# Altium PCB dsau-motherboard-revA.PcbDoc (part 2 of 4)
Units mil, origin at the board's own origin, x right, y up, seen from the top; angles counter-clockwise.
Board outline 9475 x 6400 mil, 4 copper layers (Component Side, Ground Plane, Power Plane, Solder Side), stack 65.2 mil thick; 212 components, 202 nets, 998 pads, 1047 vias.
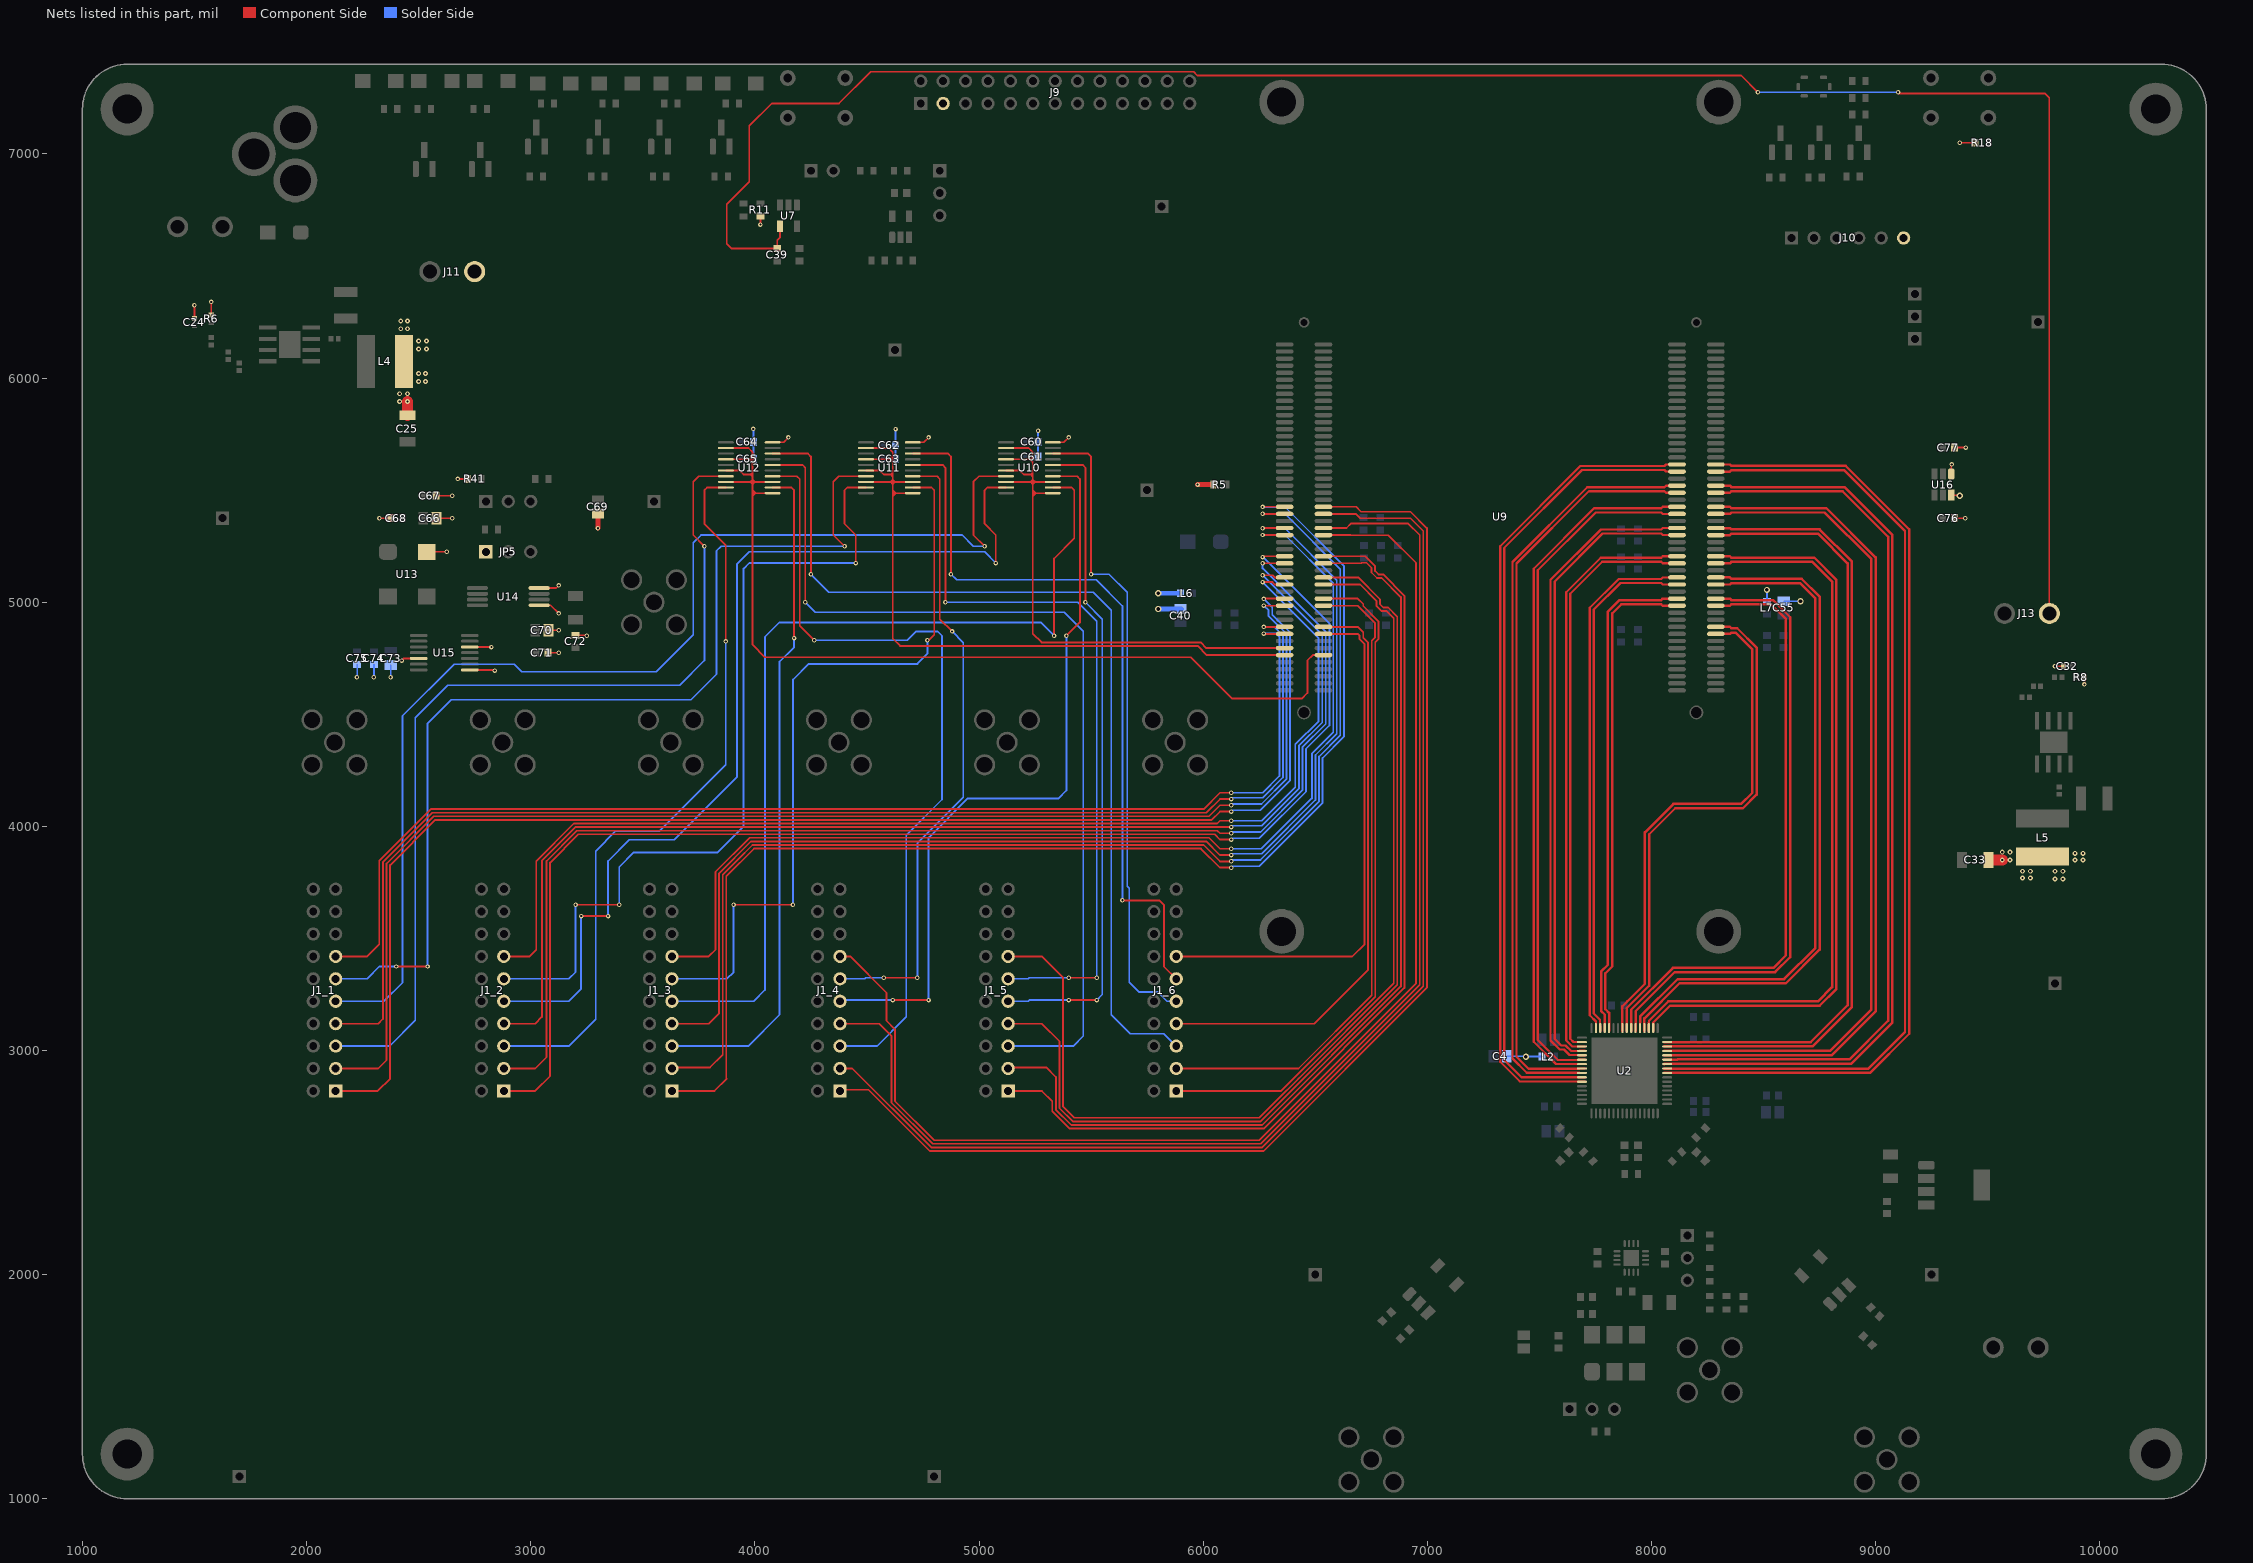
[diagram p4: the nets of this part, all layers, seen from the top]

## Via types
v1: diameter 20, hole 10, Component Side to Solder Side, 768 vias
v2: diameter 28, hole 16, Component Side to Solder Side, 117 vias
v3: diameter 22, hole 10, Component Side to Solder Side, 104 vias
v4: diameter 50, hole 28, Component Side to Solder Side, 46 vias
v5: diameter 28, hole 16, Component Side to Solder Side, tented top, 6 vias
v6: diameter 25.98, hole 12.99, Component Side to Solder Side, tented top, 5 vias
v7: diameter 25.98, hole 10, Component Side to Solder Side, tented top, 1 vias

## Nets (pads, with @x,y where several pads share a name; then routed paths per layer and width w, separated by ;. In a path a pad name is that pad's centre, name@x,y a point inside that pad or via, vN(x,y) a via of type N, cw(c..) or ccw(c..) an arc to the next point about the centre after c; other vN are vias at no path point) (continued)
CLKOUT_N: U2.56 U9.81 | length 2347.6
  Component Side w11: U2.56@7889.84,3087.17 7889.84,3189.84 7990,3290 7990,3965 8106,4081 8407.87,4081 8469,4142.13 8469,4797.78 8382.87,4883.91 8356,4883.91 8350,4889.91 8350,4890.16 U9.81@8287.11,4890.16
CLKOUT_P: U2.57 U9.83 | length 2324
  Component Side w11: U2.57@7870.16,3087.17 7870.16,3125 7870.5,3125.34 ; 7870.84,3132.87 7870.84,3125.69 7870.5,3125.34 ; U9.83@8287.11,4858.66 8350,4858.66 8356.25,4864.91 8375,4864.91 8450,4789.91 8450,4150 8400,4100 8098.13,4100 7971,3972.87 7971,3297.87 7892.13,3219 7892.07,3219 7870.5,3197.43 7870.5,3125.34
D1V8: C4.1 C32.1 C33.1 C39.2 C76.2 J13.1 L2.1 L5.1 R8.1 U7.4 U16.6 | length 9525.5
  Component Side w8: U7.4@4112.6,6677.76 4112.6,6627.6 4100,6615 C39.2@4100,6577.56 3897.44,6577.56 3875,6600 3875,6775 3975,6875 3975,7125 4075,7225 4375,7225 4516.53,7366.53 5957.2,7366.53 5973.73,7350 8400,7350 v1(8475,7275) ; v1(9100,7275) 9106,7269 9756,7269 9775,7250 J13.1@9775,4950 ; U16.6@9337.4,5477.76 9372.24,5477.76 v2(9375,5475) ; C76.2@9352.56,5375 v1(9400,5375) ; v3@9559.65,3850.35 v3@9560,3850 ; v1(9800,4714.65) C32.1@9838.5,4714.65 ; v1(9931.5,4633.5) R8.1@9931.5,4665.35
  Component Side w50: C33.1@9510,3850.35 9564.65,3850.35 v3(9565,3850)
  Solder Side w8: C4.1@7354.53,2975 7437.88,2975 v2(7440,2972.88) L2.1@7512.47,2972.88 ; v1(8475,7275) v1(9100,7275)
  other v3: 9800,3765 9835,3765 9655,3770 9690,3770 9655,3800 9690,3800 9800,3800 9835,3800 9600,3850 9890,3850 9925,3850 9890,3880 9925,3880 9565,3885 9600,3885
D3V3: C24.1 C25.1 C40.1 C55.1 C60.2 C61.1 C62.2 C63.1 C64.2 C65.1 C66.1 C67.1 C68.1 C69.1 C70.1 C71.1 C72.1 C73.1 C74.1 C75.1 C77.1 J9.3 J10.6 J11.1 JP5.1 L4.1 L6.1 L7.1 R5.2 R6.1 R11.2 R18.1 R41.1 U10.20 U11.20 U12.20 U13.4 U14.1 U14.4 U15.5 U15.8 U15.12 U16.1 | length 2794.7
  Component Side w8: C24.1@1500,6266.5 v1(1500,6325) ; R6.1@1575,6281.5 v1(1575,6340) ; v1(2325,5375) C68.1@2372.44,5375 ; v1(2425,4740) 2434.41,4749.41 U15.5@2500,4749.41 ; v3@2450,5889.65 v3@2450.35,5890 ; U13.4@2536.61,5225 v1(2625,5225) ; C67.1@2577.56,5475 v1(2650,5475) ; C66.1@2579.53,5375 v1(2650,5375) ; v1(2675,5550) R41.1@2720.47,5550 ; U15.12@2728.35,4800.59 2824.41,4800.59 v1(2825,4800) ; U15.8@2730.12,4700 U15.8@2728.35,4698.23 ; 2821.77,4698.23 U15.8@2728.35,4698.23 ; v1(2840,4695) 2836.77,4698.23 U15.8@2728.35,4698.23 ; U14.4@3037.8,5063.39 3113.39,5063.39 v1(3125,5075) ; C71.1@3077.56,4775 v1(3125,4775) ; C70.1@3079.53,4875 v1(3125,4875) ; C72.1@3200,4852.56 3247.44,4852.56 v1(3250,4850) ; v1(4025,6685) R11.2@4025,6720.47 ; U12.20@4079.33,5713.39 4128.39,5713.39 v1(4150,5735) ; U11.20@4704.33,5713.39 4753.39,5713.39 v1(4775,5735) ; U10.20@5329.33,5713.39 5378.39,5713.39 v1(5400,5735) ; U16.1@9337.4,5572.24 9337.4,5612.4 v1(9340,5615) ; C77.1@9352.56,5690 v1(9402.56,5690) ; v1(9375,7050) R18.1@9445.47,7050 ; 3088.39,4986.61 U14.1@3037.8,4986.61 3088.39,4986.61 ; 3088.39,4986.61 v1(3125,4950) 3088.39,4986.61
  Component Side w22: v1(3300,5330) C69.1@3300,5395.47 ; v1(5975,5525) R5.2@6045.47,5525
  Component Side w50: C25.1@2450,5834 2450,5894.65 v3(2450.35,5895)
  Solder Side w8: v1(2225.02,4665) 2225.85,4665.83 C75.1@2225.85,4722.44 ; v1(2300.02,4665) 2300.85,4665.83 C74.1@2300.85,4722.44 ; v1(2375.02,4665) 2375.85,4665.83 C73.1@2375.85,4720.47 ; C65.1@3993.35,5640 C64.2@3993.35,5715 v1(3993.35,5773.35) v1@3995,5775 ; v1@4625,5775 v1(4627.56,5772.44) C62.2@4627.56,5699.98 C63.1@4627.56,5639.98 ; C61.1@5263.35,5650 C60.2@5263.35,5715 v1(5263.35,5765) ; L7.1@8515.02,5002.56 v2(8515,5055) ; C55.1@8590.02,5004.53 8664.53,5004.53 v2(8665,5005)
  Solder Side w22: v2@5800,4969.53 C40.1@5904.21,4969.53 ; v2(5800,5040) 5798.23,5040 L6.1@5898.23,5040
  other v2: 5800,4970
  other v3: 2415.35,5895 2415.35,5930 2450.35,5930 2500.35,5985 2530.35,5985 2500.35,6020 2530.35,6020 2500.35,6130 2535.35,6130 2500.35,6165 2535.35,6165 2420.35,6220 2450.35,6220 2420.35,6255 2450.35,6255
DA0_N: U2.40 U9.35 | length 4398.1
  Component Side w11: U2.40@8057.17,2900.16 8080,2900.16 8080.34,2900.5 8975.5,2900.5 9150,3075 9150,5325 8866.68,5608.32 8356.25,5608.32 8350,5614.57 U9.35@8287.11,5614.57
DA0_P: U2.41 U9.37 | length 4335.1
  Component Side w11: U2.41@8057.17,2919.84 8080,2919.84 8080.34,2919.5 8967.63,2919.5 9131,3082.87 9131,5317.13 8858.81,5589.32 8356.25,5589.32 8350,5583.07 U9.37@8287.11,5583.07
DA2_N: U2.42 U9.41 | length 4148.7
  Component Side w11: U2.42@8057.17,2939.53 8057.85,2940.21 8123.63,2940.21 8125,2941.58 8891.58,2941.58 9075,3125 9075,5300 8861.17,5513.83 8356.25,5513.83 8350,5520.08 U9.41@8287.11,5520.08
DA2_P: U2.43 U9.43 | length 4085.5
  Component Side w11: U2.43@8057.17,2959.21 8115.76,2959.21 8117.13,2960.58 8883.71,2960.58 9056,3132.87 9056,5292.13 8853.3,5494.83 8356.25,5494.83 8350,5488.58 U9.43@8287.11,5488.58
DA4_N: U2.44 U9.47 | length 3855.4
  Component Side w11: U2.44@8057.17,2978.9 8100,2978.9 8100.69,2979.58 8804.58,2979.58 9000,3175 9000,5200 8780.66,5419.34 8356.25,5419.34 8350,5425.59 U9.47@8287.11,5425.59
DA4_P: U2.45 U9.49 | length 3792.1
  Component Side w11: U2.45@8057.17,2998.58 8796.71,2998.58 8981,3182.87 8981,5192.13 8772.79,5400.34 8356.25,5400.34 8350,5394.09 U9.49@8287.11,5394.09
DA6_N: U2.46 U9.53 | length 3565.7
  Component Side w11: U2.46@8057.17,3018.27 8100,3018.27 8100.34,3018.61 8718.61,3018.61 8894,3194 8894,5181 8750.15,5324.85 8356.25,5324.85 8350,5331.1 U9.53@8287.11,5331.1
DA6_P: U2.47 U9.55 | length 3502.7
  Component Side w11: U2.47@8057.17,3037.95 8100,3037.95 8100.34,3037.61 8710.74,3037.61 8875,3201.87 8875,5173.13 8742.28,5305.85 8356.25,5305.85 8350,5299.61 U9.55@8287.11,5299.61
DA8_N: U2.50 U9.61 | length 3323.4
  Component Side w11: U2.50@8007.95,3087.17 8007.95,3125 8082.95,3200 8750,3200 8825,3275 8825,5100 8726.13,5198.87 8356.25,5198.87 8350,5205.12 U9.61@8287.11,5205.12
DA8_P: U2.51 U9.63 | length 3292.2
  Component Side w11: U2.51@7988.27,3087.17 7988.27,3125 7988.95,3125.68 7988.95,3132.87 8075.08,3219 8742.13,3219 8806,3282.87 8806,5092.13 8718.26,5179.87 8356.25,5179.87 8350,5173.62 U9.63@8287.11,5173.62
DA10_N: U2.52 U9.67 | length 3038.1
  Component Side w11: U2.52@7968.58,3087.17 7968.58,3143.58 8125,3300 8600,3300 8750,3450 8750,5025 8670.62,5104.38 8356.25,5104.38 8350,5110.63 U9.67@8287.11,5110.63
DA10_P: U2.53 U9.69 | length 3006.9
  Component Side w11: U2.53@7948.9,3087.17 7948.9,3125 7949.58,3125.68 7949.58,3151.45 8117.13,3319 8592.13,3319 8731,3457.87 8731,5017.13 8662.75,5085.38 8356.25,5085.38 8350,5079.13 U9.69@8287.11,5079.13
DA12_N: U2.54 U9.73 | length 2778.3
  Component Side w11: U2.54@7929.21,3087.17 7928.87,3087.51 7928.87,3175.13 8103.74,3350 8551.87,3350 8619,3417.13 8619,3835 8619,4932.87 8575.93,4975.94 ; U9.73@8287.11,5016.14 8350,5016.14 8356.25,5009.89 8500,5009.89 8541.98,5009.89 8575.93,4975.94 ; 8563.43,4988.44 8575.93,4975.94
DA12_P: U2.55 U9.75 | length 2729.1
  Component Side w11: U2.55@7909.53,3087.17 7909.87,3087.51 7909.87,3183 8095.87,3369 8544,3369 8600,3425 8600,3631.07 8600,4925 8534.11,4990.89 8500,4990.89 8356.25,4990.89 8350,4984.64 U9.75@8287.11,4984.64
DB0_N: U2.60 U9.76 | length 2191.2
  Component Side w11: U2.60@7811.1,3087.17 7811.1,3110 7810.76,3110.34 7810.76,3167.87 7794,3184.63 7794,3344 7825,3375 7825,3450 7825,3456.07 7825,3743.93 7825,3943.93 7825,4143.94 7825,4243.94 7825,4343.94 7825,4950 7865.89,4990.89 8043.75,4990.89 8050,4984.64 U9.76@8113.89,4984.64
DB0_P: U2.61 U9.74 | length 2222.7
  Component Side w11: U2.61@7791.42,3087.17 7791.42,3110 7791.76,3110.34 7791.76,3160 7775,3176.76 7775,3351.87 7806,3382.87 7806,3536.07 7806,3736.07 7806,3836.07 7806,3936.07 7806,4136.06 7806,4236.06 7806,4336.06 7806,4957.87 7858.02,5009.89 8043.75,5009.89 8050,5016.14 U9.74@8113.89,5016.14
DB2_N: U2.62 U9.70 | length 2315
  Component Side w10: U2.62@7771.73,3087.17 7771.73,3110 7770.89,3110.84 7770.89,3137.46 7743,3165.35 7743,3482.67 7743,3605.33 7743,3701.33 7743,3866.67 7743,3962.67 7743,4085.33 7743,4175 7743,4967.54 7861.34,5085.88 8043.25,5085.88 8050,5079.13 U9.70@8113.89,5079.13
DB2_P: U2.63 U9.68 | length 2344.8
  Component Side w10: U2.63@7752.05,3087.17 7752.05,3110 7752.89,3110.84 7752.89,3130 7725,3157.89 7725,3490.13 7725,3597.87 7725,3693.87 7725,3874.13 7725,4077.87 7725,4175 7725,4975 7853.88,5103.88 8043.25,5103.88 8050,5110.63 8065,5110.63 U9.68@8113.89,5110.63
DB4_N: U2.2 U9.64 | length 2593.8
  Component Side w10: U2.2@7702.83,3037.95 U2.2@7689.84,3037.95 7680,3037.95 7652.5,3037.95 7638,3052.46 7638,5037.54 7780.82,5180.37 8043.25,5180.37 8050,5173.62 U9.64@8113.89,5173.62
DB4_P: U2.3 U9.62 | length 2654.1
  Component Side w10: U2.3@7702.83,3018.27 U2.3@7689.84,3018.27 7646.73,3018.27 7620,3045 7620,5045 7773.37,5198.37 8043.25,5198.37 8050,5205.12 U9.62@8113.89,5205.12
DB6_N: U2.4 U9.56 | length 2835.4
  Component Side w10: U2.4@7702.83,2998.58 7680,2998.58 7679.16,2997.74 7641.61,2997.74 7616.98,3022.37 7597.63,3022.37 7568,3052 7568,5092.54 7781.81,5306.35 8043.25,5306.35 8050,5299.61 U9.56@8113.89,5299.61
DB6_P: U2.5 U9.54 | length 2895.2
  Component Side w10: U2.5@7702.83,2978.9 7680,2978.9 7679.16,2979.74 7634.16,2979.74 7609.53,3004.37 7590.47,3004.37 7590.32,3004.22 7550,3044.54 7550,5100 7774.35,5324.35 8043.25,5324.35 8050,5331.1 U9.54@8113.89,5331.1
DB8_N: U2.6 U9.50 | length 3083.7
  Component Side w10: 7557.5,2982.5 7550,2990 ; U2.6@7702.83,2959.21 7675,2959.21 7674.16,2958.37 7581.63,2958.37 7550,2990 ; U9.50@8113.89,5394.09 8050,5394.09 8043.25,5400.84 7751.3,5400.84 7493,5142.54 7493,3047 7550,2990
DB8_P: U2.7 U9.48 | length 3132.8
  Component Side w10: U2.7@7702.83,2939.53 7675,2939.53 7674.16,2940.37 7574.17,2940.37 7475,3039.54 7475,5150 7743.84,5418.84 8043.25,5418.84 8050,5425.59 U9.48@8113.89,5425.59
DB10_N: U2.8 U9.44 | length 3380.1
  Component Side w10: U2.8@7702.83,2919.84 7680,2919.84 7679.16,2919 7451,2919 7398,2972 7398,5172.54 7720.79,5495.33 8058.25,5495.33 8065,5488.58 U9.44@8113.89,5488.58
DB10_P: U2.9 U9.42 | length 3439.7
  Component Side w10: U2.9@7702.83,2900.16 7680,2900.16 7679.16,2901 7443.54,2901 7380,2964.54 7380,5180 7713.33,5513.33 8058.25,5513.33 8065,5520.08 U9.42@8113.89,5520.08
DB12_N: U2.10 U9.38 | length 3594.3
  Component Side w10: U2.10@7702.83,2880.47 7419.98,2880.47 7343,2957.46 7343,5242.54 7690.27,5589.82 8058.25,5589.82 8065,5583.07 U9.38@8113.89,5583.07
DB12_P: U2.11 U9.36 | length 3654.7
  Component Side w10: U2.11@7702.83,2860.79 7680,2860.79 7678.31,2862.47 7412.53,2862.47 7325,2950 7325,5250 7682.82,5607.82 8058.25,5607.82 8065,5614.57 U9.36@8113.89,5614.57
DDS_CS1: J1_1.7 U9.182 | length 5919.6
  Component Side w8: J1_1.7@2130,3120 2320,3120 2340.63,3140.63 2340.63,3840.63 2561,4061 6014,4061 6075,4122 v1(6125,4122) ; v1(6270,4890) 6270.16,4890.16 U9.182@6363.39,4890.16
  Solder Side w8: v1(6125,4122) 6131,4128 6265.63,4128 6356,4218.37 6356,4851.63 6317.63,4890 v1(6270,4890)
DDS_CS2: J1_2.7 U9.168 | length 5597.7
  Component Side w8: J1_2.7@2880,3120 3020,3120 3050,3150 3050,3847.63 3199.37,3997 v1(6125,3997) ; v1(6265,5120) 6310.63,5120 6320,5110.63 U9.168@6363.39,5110.63
  Solder Side w8: v1(6125,3997) 6131,4003 6261.57,4003 6426.94,4168.37 6426.94,4359.31 6531,4463.37 6531,4855.11 6266.11,5120 v1(6265,5120)
DDS_CS3: J1_3.7 U9.154 | length 5246.7
  Component Side w8: J1_3.7@3630,3120 3795,3120 3840.63,3165.63 3840.63,3790.63 3983,3933 6014,3933 6075,3872 v1(6125,3872) ; v1(6265,5330) 6266.1,5331.1 U9.154@6363.39,5331.1
  Solder Side w8: v1(6125,3872) 6131,3878 6260.63,3878 6501,4118.37 6501,4318.37 6596,4413.37 6596,5099 6365,5330 v1(6265,5330)
DDS_CS4: J1_4.7 U9.153 | length 5805
  Component Side w8: J1_4.7@4380,3120 4555,3120 4609,3066 4609,2768.37 4793.37,2584 6256.63,2584 6966,3293.37 6966,5300 6915,5351 6659.23,5351 6639.33,5331.1 U9.153@6536.61,5331.1 6600,5331.1
DDS_CS5: J1_5.7 U9.167 | length 4400.3
  Component Side w8: J1_5.7@5130,3120 5280,3120 5359,3041 5359,2743.37 5418.37,2684 6257.14,2684 6866,3292.86 6866,4935.86 6825.42,4976.44 6804.25,4976.44 6789.02,4991.67 6789.02,5012.84 6691.23,5110.63 U9.167@6536.61,5110.63
DDS_CS6: J1_6.7 U9.181 | length 2657.4
  Component Side w8: J1_6.7@5880,3120 6495,3120 6736,3361 6736,4819.69 6714.02,4841.67 6714.02,4866.14 6690,4890.16 U9.181@6536.61,4890.16
DDS_IORESET: U9.190 U11.2 U11.4 U11.6 U11.8 U11.11 U11.13 | length 3505.3
  Component Side w8: U11.8@4495.67,5537.01 4605,5537.01 ; U11.6@4495.67,5587.4 4557.6,5587.4 4575,5570 4605,5570 ; U11.4@4495.67,5637.8 4600,5637.8 ; U11.2@4495.67,5688.19 4596.81,5688.19 4615,5670 4615,5652.8 ; 4615,5053.06 4615,5075 ; 4615,5525 4615,5527.01 ; 4615,5655 4615,5652.8 ; U11.11@4704.33,5486.61 4628.39,5486.61 ; U11.13@4704.33,5537.01 4625,5537.01 ; U9.190@6363.39,4764.17 6015.83,4764.17 5975,4805 4648.06,4805 4615,4838.06 4615,5075 ; 4600,5637.8 4602.2,5637.8 ; 4600,5637.8 4615,5652.8 ; 4602.2,5637.8 4615,5625 ; 4602.2,5637.8 4607.8,5637.8 ; 4605,5537.01 4615,5537.01 ; 4605,5537.01 4615,5527.01 ; 4605,5537.01 4615,5547.01 ; 4605,5570 4615,5570 ; 4605,5570 4615,5560 ; 4605,5570 4615,5580 ; 4607.8,5637.8 4610,5637.8 ; 4607.8,5637.8 4615,5645 ; 4610,5637.8 4612.2,5637.8 4615,5635 ; 4610,5637.8 4615,5632.8 ; 4615,5075 4615,5473.23 ; 4615,5473.23 4615,5475 ; 4615,5473.23 4628.39,5486.61 ; 4615,5475 4626.61,5486.61 ; 4615,5475 4615,5485 ; 4615,5485 4616.61,5486.61 4626.61,5486.61 ; 4615,5485 4615,5500 ; 4615,5500 4628.39,5486.61 ; 4615,5500 4615,5527.01 ; 4615,5527.01 4615,5537.01 ; 4615,5527.01 4625,5537.01 ; 4615,5537.01 4615,5547.01 ; 4615,5537.01 4625,5537.01 ; 4615,5547.01 4625,5537.01 ; 4615,5547.01 4615,5560 ; 4615,5560 4615,5570 ; 4615,5570 4615,5580 ; 4615,5580 4615,5625 ; 4615,5625 4615,5632.8 ; 4615,5632.8 4615,5635 ; 4615,5635 4615,5645 ; 4615,5645 4615,5652.8 ; 4626.61,5486.61 4628.39,5486.61
DDS_IORESET1: J1_1.11 U11.7 | length 4503.2
  Component Side w8: v1(2400,3375) 2535,3375 2540,3370 v1(2540,3375) ; v1(4400,5250) 4350,5300 4350,5537.2 4375,5562.2 U11.7@4495.67,5562.2
  Solder Side w8: J1_1.11@2130,3320 2270,3320 2325,3375 v1(2400,3375) ; v1@2540,3370 2540,4460 2645,4565 3715,4565 3829,4679 3829,5229 3850,5250 v1(4400,5250)
DDS_IORESET2: J1_2.11 U11.9 | length 3758
  Component Side w8: v1(3200,3650) v1(3395,3650) ; v1(4450,5175) 4450,5300 4400,5350 4400,5500 4411.81,5511.81 U11.9@4495.67,5511.81
  Solder Side w8: J1_2.11@2880,3320 3170,3320 3200,3350 v1(3200,3650) ; v1(3395,3650) 3395,3819 3460,3884 3600,3884 ; 3575,3884 3600,3884 ; v1(4450,5175) 3975,5175 3950,5150 3950,4000 3834,3884 3600,3884
DDS_IORESET3: J1_3.11 U11.12 | length 3351
  Component Side w8: v1(3905,3650) v1(4170,3650) ; U11.12@4704.33,5511.81 4788.19,5511.81 4800,5500 4800,4855 4775,4830 v1(4770,4830)
  Solder Side w8: J1_3.11@3630,3320 3875,3320 3905,3350 v1(3905,3650) ; v1(4170,3650) 4170,4655 4240,4725 4725,4725 4770,4770 v1(4770,4830)
DDS_IORESET4: J1_4.11 U11.14 | length 2901.2
  Component Side w8: v1(4575,3325) v1(4725,3325) 4650,3325 ; U11.14@4704.33,5562.2 4812.8,5562.2 4825,5550 4825,4925 v1(4880,4870)
  Solder Side w8: J1_4.11@4380,3320 4490,3320 4495,3325 v1(4575,3325) ; v1(4725,3325) 4725,3925 4930,4130 4930,4820 v1(4880,4870)
DDS_IORESET5: J1_5.11 U11.16 | length 3448.2
  Component Side w8: U11.16@4704.33,5612.6 4837.4,5612.6 4850,5600 v1(4850,5000) ; v1(5400,3325) v1(5525,3325)
  Solder Side w8: v1(4850,5000) 5440,5000 5525,4915 v1(5525,3325) ; J1_5.11@5130,3320 5220,3320 5225,3325 v1(5400,3325)
DDS_IORESET6: J1_6.11 U11.18 | length 3508.7
  Component Side w8: U11.18@4704.33,5662.99 4862.01,5662.99 4875,5650 4875,5475 ; v1(4875,5125) 4875,5475 ; 4875,5350 4875,5475 ; v1(5640,3670) 5805,3670 5825,3650 5825,3375 J1_6.11@5880,3320
  Solder Side w8: v1(4875,5125) 4900,5100 5522.63,5100 5640,4982.63 5640,3735 5640,3725 v1(5640,3670)
DDS_IOUPDATE: U9.188 U10.2 U10.4 U10.6 U10.8 U10.11 U10.13 | length 2826.3
  Component Side w8: U10.8@5120.67,5537.01 5230,5537.01 ; U10.6@5120.67,5587.4 5182.6,5587.4 5200,5570 5230,5570 ; U10.4@5120.67,5637.8 5227.2,5637.8 ; U10.2@5120.67,5688.19 5221.81,5688.19 5240,5670 5240,5650 ; 5240,5525 5240,5527.01 ; U10.11@5329.33,5486.61 5253.39,5486.61 ; U10.13@5329.33,5537.01 5250,5537.01 ; U9.188@6363.39,4795.67 6014.33,4795.67 5989,4821 5279,4821 5240,4860 5240,5473.23 ; 5227.2,5637.8 5227.8,5637.8 ; 5227.2,5637.8 5240,5625 ; 5227.8,5637.8 5232.8,5637.8 ; 5227.8,5637.8 5240,5650 ; 5230,5537.01 5240,5537.01 ; 5230,5537.01 5240,5527.01 ; 5230,5537.01 5240,5547.01 ; 5230,5570 5240,5570 ; 5230,5570 5240,5580 ; 5230,5570 5240,5560 ; 5232.8,5637.8 5235,5637.8 ; 5232.8,5637.8 5240,5645 ; 5235,5637.8 5237.2,5637.8 5240,5635 ; 5235,5637.8 5240,5632.8 ; 5240,5473.23 5240,5475 ; 5240,5473.23 5253.39,5486.61 ; 5240,5475 5240,5485 ; 5240,5475 5251.61,5486.61 ; 5240,5485 5240,5500 ; 5240,5485 5241.61,5486.61 5251.61,5486.61 ; 5240,5500 5253.39,5486.61 ; 5240,5500 5240,5527.01 ; 5240,5527.01 5240,5537.01 ; 5240,5527.01 5250,5537.01 ; 5240,5537.01 5240,5547.01 ; 5240,5537.01 5250,5537.01 ; 5240,5547.01 5240,5560 ; 5240,5547.01 5250,5537.01 ; 5240,5560 5240,5570 ; 5240,5570 5240,5580 ; 5240,5580 5240,5625 ; 5240,5625 5240,5632.8 ; 5240,5632.8 5240,5635 ; 5240,5635 5240,5645 ; 5240,5645 5240,5650 ; 5251.61,5486.61 5253.39,5486.61
DDS_IOUPDATE1: J1_1.9 U10.7 | length 5206.1
  Component Side w8: v1(5025,5250) 4975,5300 4975,5537.2 5000,5562.2 U10.7@5120.67,5562.2
  Solder Side w8: J1_1.9@2130,3220 2345,3220 2428,3303 2428,4493 2658.6,4723.6 2925.8,4723.6 2959.4,4690 3559.71,4690 3725,4855.29 3725,5265 3760,5300 4925,5300 4975,5250 v1(5025,5250)
DDS_IOUPDATE2: J1_2.9 U10.9 | length 4427.9
  Component Side w8: v1(3225,3600) 3255,3600 ; 3300,3600 3255,3600 ; v1(3345,3600) 3255,3600 ; v1(5075,5175) 5075,5300 5025,5350 5025,5500 5036.81,5511.81 U10.9@5120.67,5511.81
  Solder Side w8: J1_2.9@2880,3220 3170,3220 3225,3275 v1(3225,3600) ; v1(3345,3600) 3345,3845 3440,3940 3640,3940 3920,4220 3920,5170 3975,5225 5025,5225 v1(5075,5175)
DDS_IOUPDATE3: J1_3.9 U10.12 | length 4140.3
  Component Side w8: U10.12@5329.33,5511.81 5413.19,5511.81 5425,5500 5425,5285 5335,5195 v1(5335,4850)
  Solder Side w8: J1_3.9@3630,3220 3995,3220 4045,3270 4045,4845 4110,4910 5275,4910 v1(5335,4850)
DDS_IOUPDATE4: J1_4.9 U10.14 | length 3414.6
  Component Side w8: v1(4615,3225) 4650,3225 v1(4775,3225) ; U10.14@5329.33,5562.2 5437.8,5562.2 5450,5550 5450,4910 v1(5390,4850)
  Solder Side w8: J1_4.9@4380,3220 4385,3225 v1(4615,3225) ; v1(4775,3225) 4775,3625 ; 4775,3575 4775,3625 ; v1(5390,4850) 5390,4160 5355,4125 4950,4125 4775,3950 4775,3625
DDS_IOUPDATE5: J1_5.9 U10.16 | length 3096.5
  Component Side w8: U10.16@5329.33,5612.6 5462.4,5612.6 5475,5600 v1(5475,5000) ; v1(5400,3225) v1(5525,3225) 5450,3225
  Solder Side w8: J1_5.9@5135,3225 J1_5.9@5130,3220 5220,3220 5225,3225 v1(5400,3225) ; v1(5475,5000) 5550,4925 5550,3625 ; v1(5525,3225) 5550,3250 5550,3255 5550,3265 5550,3625 ; 5550,3575 5550,3625
DDS_IOUPDATE6: J1_6.9 U10.18 | length 3008.5
  Component Side w8: U10.18@5329.33,5662.99 5487.01,5662.99 5500,5650 5500,5475 ; v1(5500,5125) 5500,5475 ; 5500,5350 5500,5475
  Solder Side w8: v1(5500,5125) 5580,5125 5661,5044 5661,3733.37 5670,3724.37 5670,3305 5713.47,3261.53 5797.2,3261.53 5838.73,3220 J1_6.9@5880,3220
DDS_MISO1: J1_1.3 U9.176 | length 6200.7
  Component Side w8: J1_1.3@2130,2920 2320,2920 2356.63,2956.63 2356.63,3834 2567.63,4045 6026,4045 6075,4094 v1(6125,4094) ; v1(6270,4985) 6270.36,4984.64 U9.176@6363.39,4984.64
  Solder Side w8: v1(6125,4094) 6131,4100 6260.25,4100 6372,4211.75 6372,4858.25 6292,4938.25 6292,4964.11 6271.11,4985 v1(6270,4985)
DDS_MISO2: J1_2.3 U9.164 | length 5870
  Component Side w8: J1_2.3@2880,2920 3020,2920 3070.31,2970.31 3070.31,3845.31 3206,3981 6063,3981 6075,3969 v1(6125,3969) ; v1(6265,5173.62) U9.164@6363.39,5173.62
  Solder Side w8: v1(6125,3969) 6131,3975 6256.2,3975 6442.94,4161.75 6442.94,4352.69 6547,4456.75 6547,4869.11 6265,5151.11 v1(6265,5173.62)
DDS_MISO3: J1_3.3 U9.150 | length 5623.2
  Component Side w8: J1_3.3@3630,2920 3635,2925 3800,2925 3856.63,2981.63 3856.63,3784 3923.81,3851.19 ; 3861.31,3788.69 3923.81,3851.19 ; v1(6125,3844) 6075,3844 6002,3917 3989.63,3917 3923.81,3851.19 ; v1(6265,5395) 6265.91,5394.09 U9.150@6363.39,5394.09
  Solder Side w8: v1(6125,3844) 6131,3850 6255.25,3850 6517,4111.75 6517,4311.75 6612,4406.75 6612,5148 6365,5395 v1(6265,5395)
DDS_MISO4: J1_4.3 U9.149 | length 5553.7
  Component Side w8: J1_4.3@4380,2920 4434.75,2920 4786.75,2568 6263.25,2568 6982,3286.75 6982,5318 6925,5375 6700,5375 6680.91,5394.09 6600,5394.09 U9.149@6536.61,5394.09
DDS_MISO5: J1_5.3 U9.163 | length 4360.5
  Component Side w8: J1_5.3@5130,2920 5135,2925 5300,2925 5343,2882 5343,2736.75 5411.75,2668 6263.76,2668 6882,3286.24 6882,5022.77 6796.77,5108 6775.6,5108 6751,5132.6 6751,5153.77 6728.77,5176 6707.23,5176 6704.85,5173.62 U9.163@6536.61,5173.62
DDS_MISO6: J1_6.3 U9.175 | length 2935.9
  Component Side w8: J1_6.3@5880,2920 6425.25,2920 6752,3246.75 6752,4827.65 6766.02,4841.67 6766.02,4908.62 6690,4984.64 U9.175@6536.61,4984.64
DDS_MOSI1: J1_1.1 U9.174 | length 6342.9
  Component Side w8: J1_1.1@2130,2820 2317.63,2820 2372.63,2875 2372.63,3827.37 2574.25,4029 6038,4029 6075,4066 v1(6125,4066) ; v1(6270,5015) 6271.14,5016.14 U9.174@6363.39,5016.14
  Solder Side w8: v1(6125,4066) 6131,4072 6254.88,4072 6388,4205.12 6388,4864.88 6308,4944.88 6308,4978.11 6271.11,5015 v1(6270,5015)
DDS_MOSI2: J1_2.1 U9.162 | length 6024.4
  Component Side w8: J1_2.1@2880,2820 3020,2820 3086.31,2886.31 3086.31,3838.69 3212.63,3965 6051,3965 6075,3941 v1(6125,3941) ; v1(6265,5201.62) 6268.5,5205.12 U9.162@6363.39,5205.12
  Solder Side w8: v1(6125,3941) 6131,3947 6250.82,3947 6458.94,4155.12 6458.94,4346.06 6563,4450.12 6563,4906.73 6268.11,5201.62 v1(6265,5201.62)
DDS_MOSI3: J1_3.1 U9.148 | length 5704.5
  Component Side w8: J1_3.1@3630,2820 3820,2820 3875,2875 3872.63,2877.37 3872.63,3777.37 3996.25,3901 5990,3901 6075,3816 v1(6125,3816) ; v1(6265,5425) 6265.59,5425.59 U9.148@6363.39,5425.59
  Solder Side w8: v1(6125,3816) 6131,3822 6249.88,3822 6533,4105.12 6533,4305.12 6628,4400.12 6628,5162 6365,5425 v1(6265,5425)
DDS_MOSI4: J1_4.1 U9.147 | length 5649.6
  Component Side w8: J1_4.1@4380,2820 4385,2825 4507.12,2825 4780.12,2552 6269.88,2552 6998,3280.12 6998,5331 6925,5404 6704.23,5404 6682.64,5425.59 U9.147@6536.61,5425.59 6600,5425.59
DDS_MOSI5: J1_5.1 U9.161 | length 4337.1
  Component Side w8: J1_5.1@5130,2820 5280,2820 5281.06,2818.94 5327,2773 5327,2730.12 5405.12,2652 6270.39,2652 6359.2,2740.8 ; 6346.39,2728 6359.2,2740.8 ; U9.161@6536.61,5205.12 6722.28,5205.12 6767,5160.4 6767,5139.23 6782.23,5124 6803.4,5124 6898,5029.4 6898,3279.61 6359.2,2740.8
DDS_MOSI6: J1_6.1 U9.173 | length 3035.3
  Component Side w8: J1_6.1@5880,2820 6347.88,2820 6768,3240.12 6768,4821.02 6782.02,4835.04 6782.02,4915.25 6714.02,4983.25 6714.02,4992.12 6690,5016.14 U9.173@6536.61,5016.14
DDS_PWR_EN1: J1_1.13 U9.184 | length 5551.9
  Component Side w8: J1_1.13@2130,3420 2270,3420 2324.63,3474.63 2324.63,3847.25 2554.37,4077 6002,4077 6075,4150 v1(6125,4150) ; v1(6270,4860) 6271.34,4858.66 U9.184@6363.39,4858.66
  Solder Side w8: v1(6125,4150) 6265,4150 6340,4225 6340,4845 6325,4860 v1(6270,4860)
DDS_PWR_EN2: J1_2.13 U9.170 | length 5239.8
  Component Side w8: J1_2.13@2880,3420 2995,3420 3025,3450 3025,3845.25 3192.75,4013 6063,4013 6075,4025 v1(6125,4025) ; v1(6265,5090) 6309.13,5090 6320,5079.13 U9.170@6363.39,5079.13
  Solder Side w8: v1(6125,4025) 6260.94,4025 6410.94,4175 6410.94,4365.94 6515,4470 6515,4840 v1(6265,5090)
DDS_PWR_EN3: J1_3.13 U9.156 | length 4894.4
  Component Side w8: J1_3.13@3630,3420 3794.63,3420 3824.63,3450 3824.63,3797.25 3976.37,3949 ; 3975,3949 3976.37,3949 ; v1(6125,3900) 6075,3900 6026,3949 3976.37,3949 ; v1(6265,5300) 6265.39,5299.61 U9.156@6363.39,5299.61
  Solder Side w8: v1(6125,3900) 6260,3900 6485,4125 6485,4325 6580,4420 6580,5085 6365,5300 v1(6265,5300)
DDS_PWR_EN4: J1_4.13 U9.155 | length 5863.7
  Component Side w8: J1_4.13@4380,3420 4425,3420 4587.5,3257.5 4587.5,3132.5 4625,3095 4625,2775 4800,2600 6250,2600 6950,3300 6950,5175 6826,5299 6659.23,5299 6658.63,5299.61 U9.155@6536.61,5299.61 6600,5299.61
DDS_PWR_EN5: J1_5.13 U9.169 | length 4760.6
  Component Side w8: J1_5.13@5130,3420 5280,3420 5375,3325 5375,2750 5425,2700 6250.51,2700 6425.25,2874.75 ; 6326.51,2776 6425.25,2874.75 ; U9.169@6536.61,5079.13 6700.1,5079.13 6773.02,5006.21 6773.02,4985.04 6797.62,4960.44 6818.79,4960.44 6850,4929.23 6850,3299.49 6425.25,2874.75
DDS_PWR_EN6: J1_6.13 U9.183 | length 2412.7
  Component Side w8: J1_6.13@5880,3420 5880.57,3419.43 6664.43,3419.43 6720,3475 6720,4813.06 6698.02,4835.04 6698.02,4850.64 6690,4858.66 U9.183@6536.61,4858.66
DDS_SCLK: U9.189 U12.2 U12.4 U12.6 U12.8 U12.11 U12.13 | length 4543.4
  Component Side w8: U12.8@3870.67,5537.01 3980,5537.01 ; U12.6@3870.67,5587.4 3932.6,5587.4 3950,5570 3980,5570 ; U12.4@3870.67,5637.8 3977.2,5637.8 ; U12.2@3870.67,5688.19 3971.81,5688.19 3990,5670 3990,5650 ; 3990,5525 3990,5527.01 ; 3996.35,5493.65 4003.39,5486.61 ; U12.11@4079.33,5486.61 4003.39,5486.61 ; U12.13@4079.33,5537.01 4000,5537.01 ; U9.189@6537.44,4765 U9.189@6536.61,4764.17 6489.17,4764.17 6465,4740 6465,4595 6440,4570 6130,4570 5945,4755 4045,4755 3990,4810 3990,5475 ; 3977.2,5637.8 3990,5625 ; 3977.2,5637.8 3977.8,5637.8 ; 3977.8,5637.8 3990,5650 ; 3977.8,5637.8 3982.8,5637.8 ; 3980,5537.01 3990,5547.01 ; 3980,5537.01 3990,5527.01 ; 3980,5537.01 3990,5537.01 ; 3980,5570 3990,5570 ; 3980,5570 3990,5580 ; 3980,5570 3990,5560 ; 3982.8,5637.8 3990,5645 ; 3982.8,5637.8 3985,5637.8 ; 3985,5637.8 3990,5632.8 ; 3985,5637.8 3987.2,5637.8 3990,5635 ; 3990,5475 3990,5485 ; 3990,5475 3991.77,5475 4001.77,5485 ; 3990,5485 3991.61,5486.61 4003.39,5486.61 ; 3990,5485 4001.77,5485 ; 3990,5485 3990,5500 ; 3990,5500 4003.39,5486.61 ; 3990,5500 3990,5527.01 ; 3990,5527.01 3990,5537.01 ; 3990,5527.01 4000,5537.01 ; 3990,5537.01 4000,5537.01 ; 3990,5537.01 3990,5547.01 ; 3990,5547.01 4000,5537.01 ; 3990,5547.01 3990,5560 ; 3990,5560 3990,5570 ; 3990,5570 3990,5580 ; 3990,5580 3990,5625 ; 3990,5625 3990,5632.8 ; 3990,5632.8 3990,5635 ; 3990,5635 3990,5645 ; 3990,5645 3990,5650 ; 4001.77,5485 4003.39,5486.61
DDS_SCLK1: J1_1.5 U12.7 | length 4122.2
  Component Side w8: v1(3775,5250) 3725,5300 3725,5537.2 3750,5562.2 U12.7@3870.67,5562.2
  Solder Side w8: J1_1.5@2130,3020 2370,3020 2485,3135 2485,4485 2630,4630 3665,4630 3775,4740 v1(3775,5250)
DDS_SCLK2: J1_2.5 U12.9 | length 3314.1
  Component Side w8: v1(3870,4825) 3870,5255 3775,5350 3775,5500 3786.81,5511.81 U12.9@3870.67,5511.81
  Solder Side w8: J1_2.5@2880,3020 3170,3020 3290,3140 3290,3890 3380,3980 3575,3980 3870,4275 v1(3870,4825)
DDS_SCLK3: J1_3.5 U12.12 | length 3005.5
  Component Side w8: U12.12@4079.33,5511.81 4163.19,5511.81 4175,5500 v1(4175,4840)
  Solder Side w8: J1_3.5@3630,3020 3970,3020 4110,3160 4110,4735 4175,4800 v1(4175,4840)
DDS_SCLK4: J1_4.5 U12.14 | length 3582.6
  Component Side w8: U12.14@4079.33,5562.2 4187.8,5562.2 4200,5550 4200,4895 v1(4265,4830)
  Solder Side w8: v1(4265,4830) 4680,4830 4720,4870 4815,4870 4835,4850 4835,4120 4675,3960 4675,3150 4545,3020 J1_4.5@4380,3020
DDS_SCLK5: J1_5.5 U12.16 | length 4203.4
  Component Side w8: U12.16@4079.33,5612.6 4212.4,5612.6 4225,5600 v1(4225,5000)
  Solder Side w8: v1(4225,5000) 4270,4955 5380,4955 5465,4870 5465,3065 5420,3020 J1_5.5@5130,3020
DDS_SCLK6: J1_6.5 U12.18 | length 4385.3
  Component Side w8: U12.18@4079.33,5662.99 4237.01,5662.99 4250,5650 4250,5475 ; v1(4250,5125) 4250,5475 ; 4250,5350 4250,5475
  Solder Side w8: v1(4250,5125) 4330,5045 5510,5045 5590,4965 5590,3160 5675,3075 5825,3075 J1_6.5@5880,3020